# EAGLE board Stunning Maimu (EAGLE 7.6.0)

Size 56.82 x 53.33 mm. Coordinates in mm from the lower left corner, seen from the top.
Outline: 0,0 56.82,0 56.82,53.33 0,53.33 0,0
Copper layers (1*16): Top 0.035mm / dielectric 1.5mm / Bottom 0.035mm
Design rules "default": minimum track width 10mil, minimum drill 24mil, track to track 8mil, track to pad 8mil, pad to pad 8mil, via to via 8mil, smd to smd 8mil, copper to edge 40mil, drill to drill 8mil, minimum pad ring 10mil, minimum via ring 8mil, stop-mask expansion 4mil, vias tented up to drill 0mil, thermal gap 10mil

## Footprints (pad centres in the part's own frame; a part is rotated, then mirrored left to right if it is on the bottom)
DC-POWER = drill 0.889 pad 2.54 octagon: + 0,2.54; - 0,-2.54
CR2032H = drill 1.118 pad 2.54 octagon: + 5.08,10.795; +@1 -5.08,10.795; - 0,-6.985

## Placement (x,y rotation side)
BAT1  [DC-POWER]  5,10.08 0 top
BAT5  [CR2032H]  5,22.78 0 top
Meter1  [DC-POWER]  5,35.48 0 top

## Library data of the parts
BAT1 BAT5 Meter1 = AUTODESK_CIRCUITS_BREADBOARD

## Nets
N$1: Meter1.+
N$2: BAT5.+ BAT5.+@1 Meter1.-
N$3: BAT1.- BAT5.-
N$4: BAT1.+

## Tracks (layer width: path | path; a pad name or v marks a point on that pad's centre or on a via)
N$2  (2 unrouted)
N$3  (1 unrouted)